# EAGLE board carte_ascenseur_v2 (EAGLE 6.1)
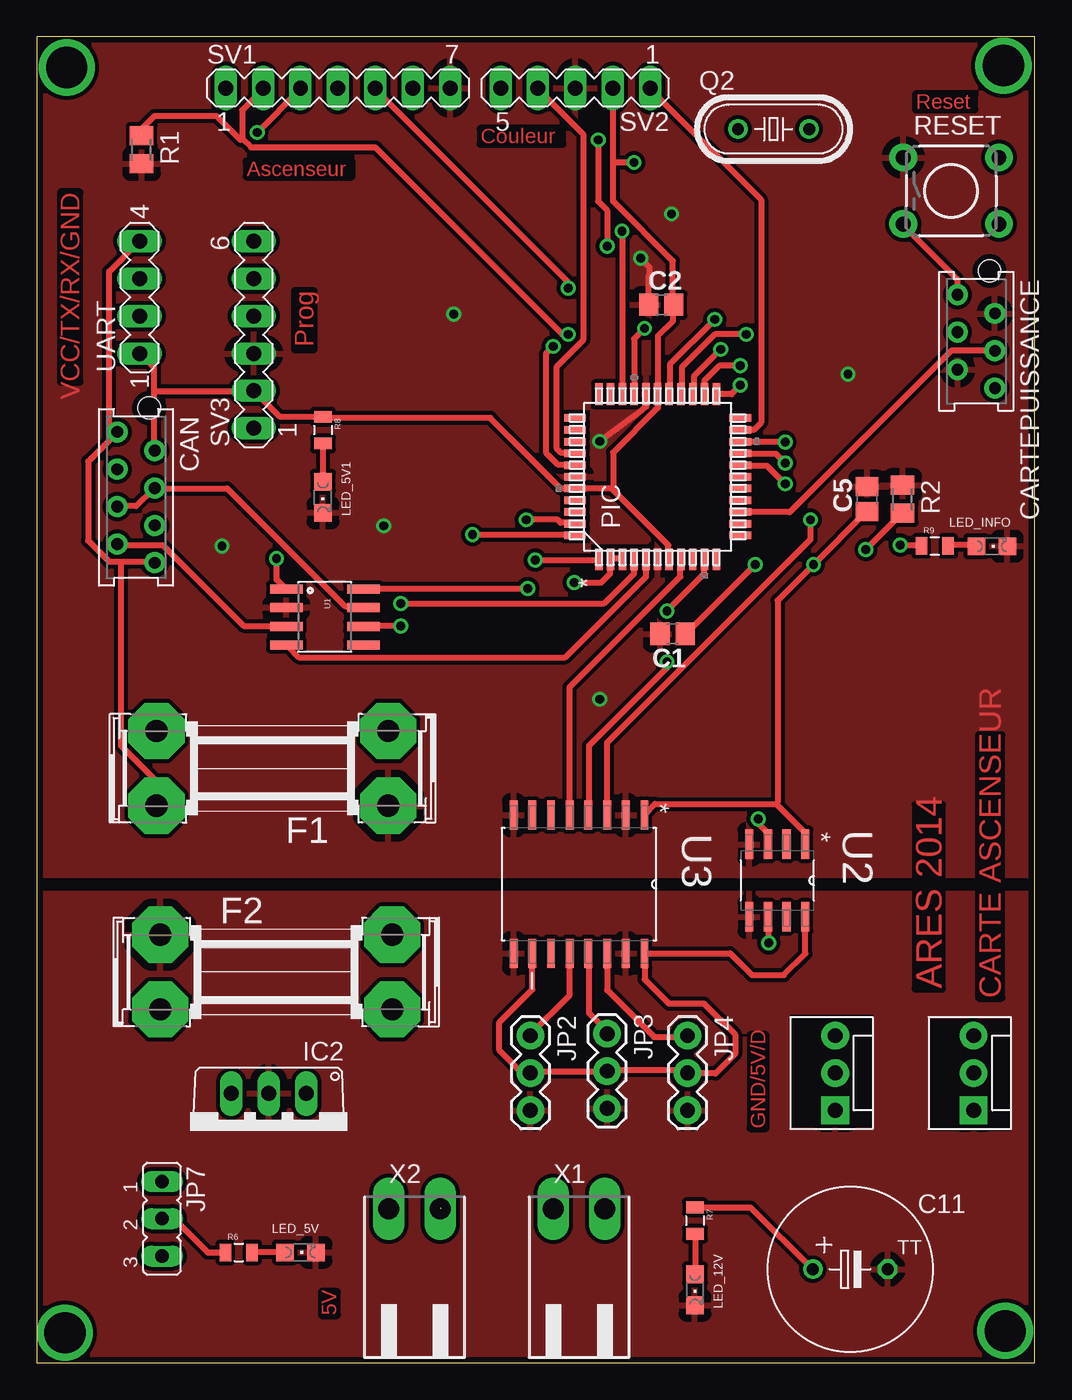
[diagram p0: board, top side]
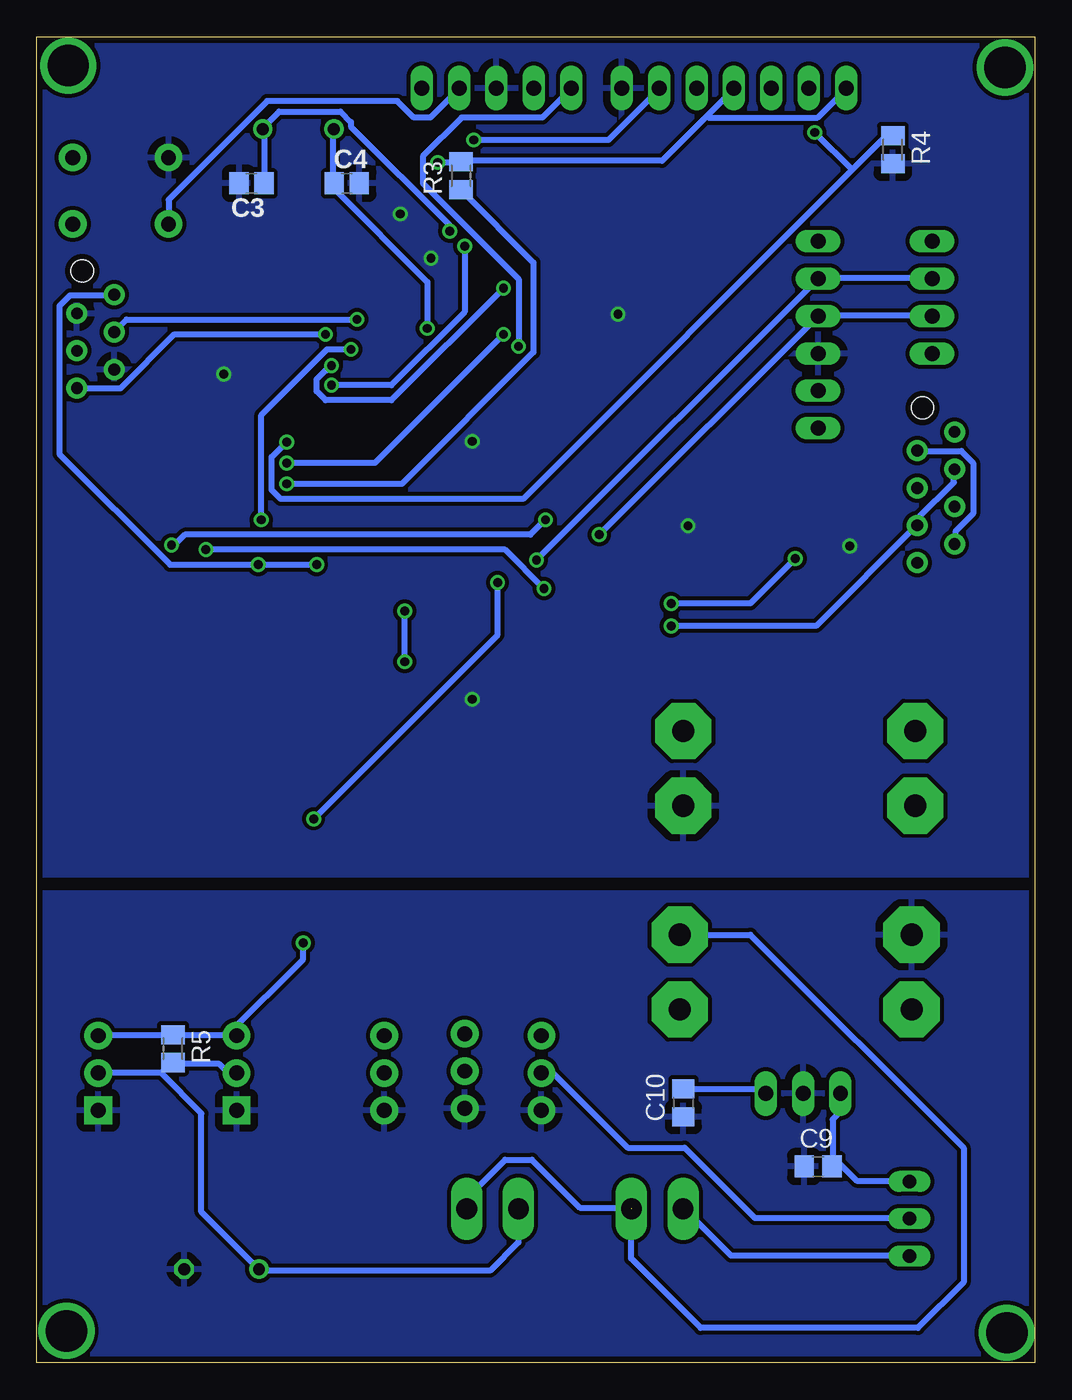
[diagram p1: board, bottom side, seen from below]

Size 67.8 x 90.09 mm. Coordinates in mm from the lower left corner, seen from the top.
Outline: 0,0 67.8,0 67.8,90.09 0,90.09 0,0
Copper layers (1*16): Top 0.035mm / dielectric 1.5mm / Bottom 0.035mm
Design rules: minimum track width 0.4mm, minimum drill 0.6mm, track to track 0.27mm, track to pad 0.27mm, pad to pad 0.27mm, via to via 0.27mm, smd to smd 8mil, copper to edge 0.4mm, drill to drill 8mil, minimum pad ring 10mil, minimum via ring 8mil, stop-mask expansion 4mil, vias tented up to drill 0mil, thermal gap 20mil
Net classes: 1 +5V: width 0.6 mm, drill 0.2 mm, clearance 0.4 mm
tRestrict: area 51.2,16 to 56.8,23.6; area 60.6,15.7 to 66.2,23.4
vRestrict: area 31.6,28.7 to 42.2,36.3; area 47.8,30.7 to 52.7,34.8; area 37.1,51.8 to 47.2,68.3; area 33.8,55.1 to 50.3,65.3; area 15.2,47.1 to 24.1,54.1

## Footprints (pad centres in the part's own frame; a part is rotated, then mirrored left to right if it is on the bottom)
0805 = smd 1.3 x 1.5: 1 -0.85,0; 2 0.85,0
C0805 = smd 1.3 x 1.5: 1 -0.95,0; 2 0.95,0
TT5D11 = drill 0.813: + -2.54,0 | drill 0.813 octagon: - 2.54,0
AMP-215079-8 = drill 0.8 pad 1.422: 1 0,-1.27; 2 1.27,1.27; 3 2.54,-1.27; 4 3.81,1.27; 5 5.08,-1.27; 6 6.35,1.27; 7 7.62,-1.27; 8 8.89,1.27 | hole 1.5: -1.62,0.905
AMP-215079-6 = drill 0.8 pad 1.422: 1 0,0; 2 1.27,2.54; 3 2.54,0; 4 3.81,2.54; 5 5.08,0; 6 6.35,2.54 | hole 1.5: -1.62,2.175
SHK20Q = drill 1.5 pad 3.81 octagon: 1A -7.874,2.54; 1B -7.874,-2.54; 2A 7.874,2.54; 2B 7.874,-2.54
TO220V = drill 1.016 long: 1 -2.54,-2.54; 2 0,-2.54; 3 2.54,-2.54
MOLEX-1X3 = drill 1.016 pad 1.88 square: 1 0,0 | drill 1.016 pad 1.88: 2 2.54,0; 3 5.08,0
1X03 = drill 1.016 pad 1.88: 1 0,0; 2 2.54,0; 3 5.08,0
JP2 = drill 0.914 long: 1 -2.54,0; 2 0,0; 3 2.54,0
CHIPLED_0805 = smd 1.2 x 1.2: A 0,-1.05; C 0,1.05
TQFP44_MC = smd 1.473 x 0.508: 1 -5.613,3.988; 2 -5.613,3.2; 3 -5.613,2.388; 4 -5.613,1.6; 5 -5.613,0.787; 6 -5.613,0; 7 -5.613,-0.787; 8 -5.613,-1.6; 9 -5.613,-2.388; 10 -5.613,-3.2; 11 -5.613,-3.988; 23 5.613,-3.988; 24 5.613,-3.2; 25 5.613,-2.388; 26 5.613,-1.6; 27 5.613,-0.787; 28 5.613,0; 29 5.613,0.787; 30 5.613,1.6; 31 5.613,2.388; 32 5.613,3.2; 33 5.613,3.988 | smd 0.508 x 1.473: 12 -3.988,-5.613; 13 -3.2,-5.613; 14 -2.388,-5.613; 15 -1.6,-5.613; 16 -0.787,-5.613; 17 0,-5.613; 18 0.787,-5.613; 19 1.6,-5.613; 20 2.388,-5.613; 21 3.2,-5.613; 22 3.988,-5.613; 34 3.988,5.613; 35 3.2,5.613; 36 2.388,5.613; 37 1.6,5.613; 38 0.787,5.613; 39 0,5.613; 40 -0.787,5.613; 41 -1.6,5.613; 42 -2.388,5.613; 43 -3.2,5.613; 44 -3.988,5.613
HC49/S = drill 0.813: 1 -2.413,0; 2 2.413,0
M0805 = smd 1.3 x 1.6: 1 -0.95,0; 2 0.95,0
0805' = smd 0.8 x 1.2: 1 -0.9,0; 2 0.9,0
TACTILE-PTH = drill 1.016 pad 1.88: 1 -3.251,2.261; 2 3.251,2.261; 3 -3.251,-2.261; 4 3.251,-2.261
MA07-1 = drill 1.016 long: 1 -7.62,0; 2 -5.08,0; 3 -2.54,0; 4 0,0; 5 2.54,0; 6 5.08,0; 7 7.62,0
MA05-1 = drill 1.016 long: 1 -5.08,0; 2 -2.54,0; 3 0,0; 4 2.54,0; 5 5.08,0
MA06-1 = drill 1.016 long: 1 -6.35,0; 2 -3.81,0; 3 -1.27,0; 4 1.27,0; 5 3.81,0; 6 6.35,0
SO08 = smd 0.61 x 2.21: 1 -1.905,-2.616; 2 -0.635,-2.616; 3 0.635,-2.616; 4 1.905,-2.616; 5 1.905,2.616; 6 0.635,2.616; 7 -0.635,2.616; 8 -1.905,2.616
SOIC127P600X175-8N = smd 1.981 x 0.559: 1 -2.464,1.905; 2 -2.464,0.635; 3 -2.464,-0.635; 4 -2.464,-1.905; 5 2.464,-1.905; 6 2.464,-0.635; 7 2.464,0.635; 8 2.464,1.905
SOIC127P1032X265-16N = smd 1.981 x 0.533: 1 -4.699,4.445; 2 -4.699,3.175; 3 -4.699,1.905; 4 -4.699,0.635; 5 -4.699,-0.635; 6 -4.699,-1.905; 7 -4.699,-3.175; 8 -4.699,-4.445; 9 4.699,-4.445; 10 4.699,-3.175; 11 4.699,-1.905; 12 4.699,-0.635; 13 4.699,0.635; 14 4.699,1.905; 15 4.699,3.175; 16 4.699,4.445
MA04-1 = drill 1.016 long: 1 -3.81,0; 2 -1.27,0; 3 1.27,0; 4 3.81,0
90-2 = drill 1.422 long: 1 -1.75,5.25; 2 1.75,5.25

## Placement (x,y rotation side)
C1  10nF  [0805]  43.18,49.53 180 top
C2  10nF  [0805]  42.42,71.88 0 top
C3  22pF  [0805]  53.21,80.14 180 bottom
C4  22pF  [0805]  46.74,80.14 0 bottom
C5  10nF  [0805]  56.39,58.67 90 top
C9  100nF  [C0805]  14.73,13.34 0 bottom
C10  330nF  [C0805]  23.88,17.65 90 bottom
C11  2200u  [TT5D11]  55.25,6.35 0 top
CAN  Micromatch 8p  [AMP-215079-8]  6.73,63.25 270 top
CARTEPUISSANCE  MMATCH-6-  [AMP-215079-6]  62.53,72.57 270 top
F1  [SHK20Q]  16,40.39 180 top
F2  [SHK20Q]  16.26,26.54 0 top
IC2  7805TV  [TO220V]  15.75,15.75 180 top
JP1  AX12  [MOLEX-1X3]  63.63,17.15 90 top
JP2  Servo doigt  [1X03]  33.53,22.23 270 top
JP3  Servo pannier  [1X03]  38.73,22.35 270 top
JP4  'Servo' lanceur  [1X03]  44.2,22.23 270 top
JP5  AX12  [MOLEX-1X3]  54.23,17.15 90 top
JP7  [JP2]  8.51,9.78 270 top
LED_5V  [CHIPLED_0805]  17.91,7.49 270 top
LED_5V1  [CHIPLED_0805]  19.43,58.8 180 top
LED_12V  [CHIPLED_0805]  44.7,4.95 180 top
LED_INFO  [CHIPLED_0805]  64.87,55.47 270 top
PIC  DSPIC30F4011-XXX/PT  [TQFP44_MC]  42.16,60.2 90 top
Q2  [HC49/S]  50.04,83.82 0 top
R1  20k  [M0805]  7.11,82.42 270 top
R2  4,7k  [M0805]  58.8,58.67 270 top
R3  20k  [M0805]  38.99,80.64 90 bottom
R4  20k  [M0805]  9.65,82.42 270 bottom
R5  10k  [M0805]  58.55,21.34 270 bottom
R6  200  [0805']  13.72,7.49 0 top
R7  1k  [0805']  44.7,9.65 270 top
R8  200  [0805']  19.43,63.37 270 top
R9  200  [0805']  60.99,55.5 0 top
RESET  SWITCH-MOMENTARY-2PTH  [TACTILE-PTH]  62.1,79.63 0 top
SV1  Retour ascenseur  [MA07-1]  20.45,86.61 0 top
SV2  Carte couleur  [MA05-1]  36.58,86.61 180 top
SV3  Programmateur  [MA06-1]  14.73,69.85 90 top
U1  MCP2551  [SO08]  19.56,50.67 270 top
U2  ADUM1250ARZ  [SOIC127P600X175-8N]  50.29,32.77 270 top
U3  ADUM1400ARWZ  [SOIC127P1032X265-16N]  36.83,32.51 270 top
UART  [MA04-1]  6.98,72.39 90 top
X1  12V Dirty  [90-2]  36.83,5.21 0 top
X2  5V Dirty  [90-2]  25.65,5.21 0 top

## Library data of the parts
C1-C5 = mbed-rlcq
C9-C11 R1-R5 = rcl
CAN CARTEPUISSANCE = jt-con-micromatch
F1 F2 = fuse; OC_FARNELL: unknown; OC_NEWARK: unknown
IC2 = linear
JP1-JP5 = SparkFun-Connectors
JP7 = jumper
LED_5V LED_5V1 LED_12V LED_INFO = adafruit
PIC = UL-PIC
Q2 = crystal; OC_FARNELL: 1667008; OC_NEWARK: unknown
R6-R9 = SparkFun-Passives; OC_FARNELL: unknown
RESET = SparkFun-Electromechanical
SV1-SV3 UART = con-lstb; OC_FARNELL: unknown; OC_NEWARK: unknown
U1 = SparkFun-DigitalIC
U2 = Analog Devices_By_element14_Batch_1; MPN: ADUM1250ARZ; OC_FARNELL: 1814353; OC_NEWARK: 27M9880; PACKAGE: SOIC-8; SUPPLIER: Analog Devices
U3 = Analog Devices_By_element14_Batch_1; MPN: ADUM1400ARWZ; OC_FARNELL: 1226217; OC_NEWARK: 19M8755; PACKAGE: SOIC-16; SUPPLIER: Analog Devices
X1 X2 = con-weidmueller-sl35; OC_FARNELL: unknown; OC_NEWARK: unknown

## Nets
!MCLR!: SV3.1
+5V: JP2.2 JP3.2 JP4.2 JP7.2 R6.1 U2.8 U3.10 U3.16
+12V: C11.+ JP1.2 JP5.2 R5.2 R7.1 X1.1
C_S2: PIC.38 SV2.5
C_S3: PIC.37 SV2.4
CANH: CAN.4 CAN.5 U1.7
CANL: CAN.3 CAN.6 U1.6
COULEUR: PIC.21 SV2.1
DOIGT: PIC.8 U3.5
FCB: PIC.20 R4.1 SV1.3
FCH: PIC.19 R1.1 SV1.2
GND1: C1.2 C2.1 C3.2 C4.2 C5.2 CARTEPUISSANCE.2 CARTEPUISSANCE.5 F1.1A LED_5V1.C LED_INFO.C PIC.6 PIC.29 PIC.39 R1.2 R2.1 R4.2 RESET.1 SV1.7 SV2.3 SV3.3 U1.2 U2.4 U3.2 U3.8
GND2: C9.1 C10.1 C11.- F2.1A IC2.2 JP1.1 JP2.3 JP3.3 JP4.3 JP5.1 LED_5V.C LED_12V.C U2.5 U3.9 U3.15
LANCEUR: PIC.25 U3.3
N$1: PIC.4 U1.1
N$2: LED_5V.A R6.2
N$3: PIC.5 U1.4
N$4: R2.2 U1.8
N$5: LED_INFO.A R9.2
N$6: C9.2 IC2.3 JP7.1
N$7: PIC.2 PIC.3 U2.3
N$8: JP4.1 U3.14
N$9: JP3.1 U3.13
N$10: JP2.1 U3.12
N$11: LED_12V.A R7.2
N$12: LED_5V1.A R8.2
N$15: C3.1 PIC.31 Q2.2
N$16: JP1.3 JP5.3 R5.1 U2.6
N$18: C4.1 PIC.30 Q2.1
N$25: PIC.43 R9.1
N$27: F2.2A X1.2 X2.2
N$29: CAN.1 CAN.8 F1.2A UART.4
N$30: PIC.18 R3.1
N$31: JP7.3 X2.1
N$32: C10.2 IC2.1
PANNIER: PIC.10 U3.4
PGC: PIC.1 SV3.5 UART.3
PGD: PIC.44 SV3.4 UART.2
POMPE: CARTEPUISSANCE.6 PIC.26
PWM: CARTEPUISSANCE.4 PIC.14
QEA: PIC.24 SV1.5
QEB: PIC.23 SV1.6
SENS: CARTEPUISSANCE.3 PIC.27
VCC: C1.1 C2.2 C5.1 CAN.2 CAN.7 CARTEPUISSANCE.1 PIC.7 PIC.28 PIC.40 R3.2 R8.1 RESET.3 SV1.1 SV1.4 SV2.2 SV3.2 U1.3 U2.1 U3.1 UART.1

## Tracks (layer width: path | path; a pad name or v marks a point on that pad's centre or on a via)
+5V
  Top 0.4: 39.24,19.89 38.73,19.89 JP3.2 38.63,19.79 33.66,19.79 JP2.2 32.94,19.69 31.42,21.21 31.42,23.14 33.66,25.38 U3.10 | 52.15,31.06 52.15,30.35 U2.8 | 43.61,19.69 JP4.2 | R6.1 11.61,7.49 9.37,9.73 8.56,9.73 JP7.2
  Top 0.406: 39.24,19.89 43.99,19.89 JP4.2 44.22,19.66 46.1,19.66 47.42,20.98 47.42,22.3 45.31,24.41 42.93,24.41 41.28,26.06 U3.16 47.09,27.81 48.57,26.34 50.75,26.34 52.2,27.79 U2.8
  Bottom 0.4: JP2.2 32.74,19.69 27.66,14.61 23.8,14.61 19.02,9.83 8.56,9.83 JP7.2
+12V
  Top 0.4: C11.+ 52.65,6.38 48.49,10.54 44.73,10.54 R7.1 44.73,10.64
  Bottom 0.4: JP5.2 54.79,19.69 55.4,20.3 58.55,20.3 R5.2 58.65,20.4 59.36,19.69 | 59.36,19.69 JP1.2 | 59.36,19.69 56.62,16.94 56.62,10.24 52.76,6.38 C11.+
  Bottom 0.406: X1.1 35.08,8.18 37.01,6.25 52.6,6.25 C11.+
C_S2  (via drill 0.6)
  Top 0.4: v35.08,69.06 34.57,68.56 34.57,61.85 35.38,61.04 36.5,61.04 PIC.38
  Bottom 0.4: v35.08,69.06 35.08,73.64 41.58,80.14 41.58,81.97 38.94,84.61 33.45,84.61 31.52,86.54 SV2.5
C_S3
  Top 0.4: PIC.37 36.5,61.85 35.59,61.85 35.28,62.15 35.28,67.64 37.11,69.47 37.11,83.49 34.06,86.54 SV2.4
CANH
  Top 0.4: U1.7 22.17,51.38 20.95,51.38 12.93,59.41 8.05,59.41 CAN.4 7.85,59.31 6.73,58.19 5.51,58.19 CAN.5
CANL  (via drill 0.6)
  Top 0.4: v24.71,50.06 22.17,50.06 U1.6
  Bottom 0.4: v24.71,50.06 14.86,50.06 8.05,56.87 CAN.6 7.95,57.07 7.95,57.38 5.51,59.82 5.51,60.63 CAN.3
COULEUR
  Top 0.4: PIC.21 47.78,63.37 48.69,63.37 49.2,63.88 49.2,79.02 41.68,86.54 SV2.1
DOIGT
  Top 0.4: U3.5 36.2,45.9 43.71,53.42 43.71,54.53 PIC.8
FCB  (via drill 0.6)
  Top 0.4: v50.83,62.56 47.78,62.56 PIC.20 | v14.96,83.59 17.91,86.54 SV1.3
  Bottom 0.4: v50.83,62.56 51.84,61.54 51.84,59.31 51.23,58.7 34.77,58.7 12.42,81.05 | 12.42,81.05 10.18,83.29 9.68,83.29 R4.1 | 12.42,81.05 v14.96,83.59
FCH  (via drill 0.6)  (1 unrouted)
  Top 0.4: v50.83,61.14 50.22,61.75 47.78,61.75 PIC.19 | v36.09,69.88 35.69,69.88 22.99,82.58 14.55,82.58 13.95,83.19 | 13.95,83.19 13.95,85.11 15.37,86.54 SV1.2 | 12.22,84.71 13.84,83.08 13.95,83.19
  Top 0.406: 12.22,84.71 7.98,84.71 7.11,83.84 7.11,83.44 7.14,83.41 R1.1 | R1.1 7.14,83.39 7.11,83.36 R1.1
  Bottom 0.4: v50.83,61.14 44.83,61.14 v36.09,69.88
GND1  (via drill 0.6)
  Top 0.406: v38.23,62.61 40.66,64.41 40.87,64.54 41.4,65 PIC.29 | C2.1 41.57,73.9 41.63,73.97 41.63,74.42 41,75.06 v41.02,75.06 41.05,75.06
  other vias: 28.32,71.25 12.57,55.5 38.23,45.09 55.09,67.18 43.1,78.05 23.57,56.87
  pour Top: -8.51,33.15 79.12,33.15 79.12,94.11 -8.51,94.11
  pour Bottom: -16.13,33.15 89.28,33.15 89.28,101.73 -16.13,101.73
GND2
  pour Top: -8.51,31.88 79.12,31.88 79.12,-3.68 -8.51,-3.68
  pour Bottom: -16.13,31.88 89.28,31.88 89.28,-10.03 -16.13,-10.03 -16.13,30.61
LANCEUR  (via drill 0.6)
  Top 0.4: v46.46,68.86 44.63,67.03 44.63,65.81 PIC.25 | v52.55,57.28 52.55,55.96 38.73,42.14 U3.3
  Bottom 0.4: v46.46,68.86 48.08,68.86 52.55,64.39 v52.55,57.28
N$1  (via drill 0.6)
  Top 0.4: PIC.4 40.56,53.62 38.53,51.59 v24.71,51.59 | v16.28,54.64 16.28,53.21 16.89,52.6 U1.1
  Bottom 0.4: v24.71,51.59 19.33,51.59 v16.28,54.64
N$2
  Top 0.4: LED_5V.A R6.2
N$3
  Top 0.4: PIC.5 41.38,53.42 35.89,47.93 17.8,47.93 16.99,48.74 U1.4
N$4  (via drill 0.6)
  Top 0.4: v56.31,55.25 58.75,57.68 R2.2 | v33.35,52.6 22.17,52.6 U1.8
  Bottom 0.4: v56.31,55.25 35.99,55.25 v33.35,52.6
N$5
  Top 0.4: R9.2 61.9,55.55 63.73,55.55 LED_INFO.A
N$6
  Bottom 0.4: IC2.3 13.23,18.26 13.23,17.04 13.74,16.54 13.74,13.39 C9.2 13.64,13.89 12.12,12.37 8.56,12.37 JP7.1
N$7  (via drill 0.6)
  Top 0.4: PIC.3 39.75,54.64 39.04,54.64 PIC.2 38.94,54.43 38.94,53.62 38.33,53.01 v36.5,53.01 | v49,36.96 49,36.65 49.61,36.04 49.61,35.23 U2.3
  Bottom 0.4: v36.5,53.01 36.5,49.45 v49,36.96
N$8
  Top 0.4: 38.73,26.8 U3.14
  Top 0.406: 38.73,26.8 38.73,25.32 41.94,22.12 44.09,22.12 JP4.1
N$9
  Top 0.4: JP3.1 38.73,22.53 37.52,23.75 37.52,27.81 U3.13
N$10
  Top 0.4: U3.12 36.2,24.97 33.45,22.23 JP2.1
N$11
  Top 0.4: LED_12V.A 44.73,6.07 44.73,8.71 R7.2
N$12
  Top 0.4: R8.2 LED_5V1.A
N$15  (via drill 0.6)
  Top 0.4: v39.75,76.89 39.75,65.81 PIC.31
  Bottom 0.4: v39.75,76.89 39.75,77.29 46.46,84 46.46,84.3 47.17,85.01 51.33,85.01 52.45,83.9 Q2.2 52.35,83.69 52.35,80.14 C3.1
N$16  (via drill 0.6)
  Top 0.4: v49.71,28.52 49.71,30.25 U2.6
  Bottom 0.4: v49.71,28.52 49.71,27.41 54.79,22.33 JP5.3 58.55,22.23 R5.1 58.65,22.23 JP1.3
N$18  (via drill 0.6)
  Top 0.4: PIC.30 40.56,69.57 v41.28,70.28
  Bottom 0.4: v41.28,70.28 41.28,73.43 47.57,79.73 47.57,80.14 C4.1 47.68,80.24 47.68,83.8 Q2.1
N$20  (via drill 2.8)
  other vias: 65.66,88.14
N$21  (via drill 2.8)
  other vias: 1.9,2.03
N$22  (via drill 2.8)
  other vias: 65.79,2.16
N$23  (via drill 2.8)
  other vias: 2.03,88.01
N$25  (via drill 0.6)
  Top 0.4: v58.65,55.55 60.07,55.55 R9.1 | v33.25,57.28 35.38,57.28 35.59,57.07 36.5,57.07 PIC.43
  Bottom 0.4: v58.65,55.55 58.45,55.55 57.73,56.26 34.27,56.26 v33.25,57.28
N$27  (1 unrouted)
  Bottom 0.4: X2.2 27.46,10.54 30.91,10.54 34.16,13.79 35.99,13.79 38.53,11.25 38.53,10.54 X1.2
  Bottom 0.406: F2.2A 19.33,29.08 4.85,14.61 4.85,5.46 7.95,2.36 22.71,2.36 27.43,7.09 27.43,10.49
N$29
  Top 0.4: 5.71,54.43 4.9,54.43 3.48,55.86 3.48,61.24 5.41,63.17 CAN.1 4.9,62.86 4.9,74.14 6.93,76.17 UART.4 | 5.71,54.43 7.95,54.43 CAN.8 | 5.71,54.43 5.71,41.94 8.05,39.6 8.05,37.87 F1.2A
N$30  (via drill 0.6)
  Top 0.4: v50.83,59.72 49.61,60.94 47.78,60.94 PIC.18
  Bottom 0.4: v50.83,59.72 43,59.72 34.06,68.66 34.06,74.75 38.94,79.63 R3.1
N$31
  Bottom 0.4: JP7.3 8.56,7.29 20.65,7.29 23.9,10.54 X2.1
N$32
  Bottom 0.4: C10.2 23.8,18.57 18.52,18.57 18.31,18.36 IC2.1
PANNIER  (via drill 0.6)
  Top 0.4: v42.8,51.08 45.34,53.62 45.34,54.53 PIC.10 | v42.8,47.62 42.8,47.22 37.52,41.94 37.52,37.26 U3.4
  Bottom 0.4: v42.8,47.62 v42.8,51.08
PGC  (via drill 0.6)
  Top 0.4: v33.86,54.53 38.12,54.53 PIC.1
  Bottom 0.4: v33.86,54.53 SV3.5 14.55,73.74 7.04,73.74 UART.3
PGD  (via drill 0.6)
  Top 0.4: v29.59,56.26 36.5,56.26 PIC.44
  Bottom 0.4: v29.59,56.26 SV3.4 14.55,71.2 7.04,71.2 UART.2
POMPE  (via drill 0.6)
  Top 0.4: v48.18,69.88 46.05,69.88 43.82,67.64 43.82,65.81 PIC.26
  Bottom 0.4: v48.18,69.88 58.45,69.88 62.1,66.22 CARTEPUISSANCE.6
PWM
  Top 0.4: CARTEPUISSANCE.4 62.1,68.76 51.13,57.78 47.78,57.78 PIC.14
QEA  (via drill 0.6)
  Top 0.4: v47.78,67.74 46.36,67.74 45.34,66.73 45.34,65.81 PIC.24 | v36.09,73.03 36.09,73.43 22.99,86.54 SV1.5
  Bottom 0.4: v47.78,67.74 48.08,67.44 48.18,67.44 48.79,66.83 48.79,66.02 48.18,65.41 43.71,65.41 v36.09,73.03
QEB  (via drill 0.6)
  Top 0.4: PIC.23 47.17,65.81 v47.78,66.42 | v38.73,75.87 38.73,78.31 38.12,78.92 v38.12,83.08
  Bottom 0.4: v47.78,66.42 43.71,66.42 38.73,71.4 v38.73,75.87 | v38.12,83.08 28.98,83.08 25.53,86.54 SV1.6
SENS  (via drill 0.6)
  Top 0.4: v46.05,70.89 43,67.84 43,65.81 PIC.27
  Bottom 0.4: v46.05,70.89 61.7,70.89 62.51,70.08 CARTEPUISSANCE.3
VCC  (via drill 0.6)
  Top 0.4: 50.22,37.97 52.15,36.04 52.15,35.23 U2.1 | 50.22,37.97 41.99,37.97 41.28,37.26 U3.1 | v48.79,54.23 44.12,49.55 C1.1 | C5.1 56.31,57.78 v52.76,54.23 50.32,51.79 50.32,38.08 50.22,37.97 | U1.3 16.89,50.06 14.05,50.06 8.56,55.55 5.51,55.55 CAN.7 | 7.95,66.02 7.95,67.64 7.04,68.56 UART.1 | 7.95,66.02 7.95,62.05 CAN.2 | 7.95,66.02 14.55,66.02 SV3.2 16.48,64.29 R8.1 19.53,64.19 30.81,64.19 35.59,59.41 PIC.40 39.04,59.41 | CARTEPUISSANCE.1 62.51,72.62 62.51,73.64 58.85,77.29 RESET.3 | 39.04,59.41 42.9,55.55 42.9,54.64 PIC.7 | 39.14,81.56 39.14,78.92 43.21,74.85 43.21,72.01 C2.2 43.21,71.81 43.21,70.79 42.19,69.77 42.19,65.81 PIC.28 42.19,65.71 42.19,64.9 39.14,61.85 39.14,59.51 39.04,59.41 | 39.14,81.56 39.14,86.54 SV2.2 | 39.14,81.56 v40.56,81.56
  Bottom 0.4: v48.79,54.23 v52.76,54.23 58.75,54.23 66.27,61.75 66.27,71.81 65.56,72.52 62.61,72.52 CARTEPUISSANCE.1 | CAN.7 5.41,55.65 5.41,56.46 4.19,57.68 4.19,61.14 5,61.95 7.95,61.95 CAN.2 | 22.28,84.71 20.45,86.54 SV1.4 | 22.28,84.71 25.32,81.66 38.94,81.66 R3.2 39.14,81.56 v40.56,81.56 | SV1.1 12.83,86.54 14.76,84.61 22.17,84.61 22.28,84.71 | RESET.3 58.85,79.02 52.15,85.73 43.31,85.73 42.19,84.61 41.07,84.61 39.14,86.54 SV2.2

## Text on the board
Top: Reset | Couleur | Ascenseur | VCC/TX/RX/GND | Prog | ARES 2014 | CARTE ASCENSEUR | GND/5V/D | 5V